# Altium PCB Micromouse_PCB.PcbDoc (part 1 of 3)
Units mm, origin at the board's own origin, x right, y up, seen from the top; angles counter-clockwise.
Board outline 89.28 x 101.5 mm, 2 copper layers (Top Layer, Bottom Layer); 118 components, 108 nets, 360 pads, 157 vias.
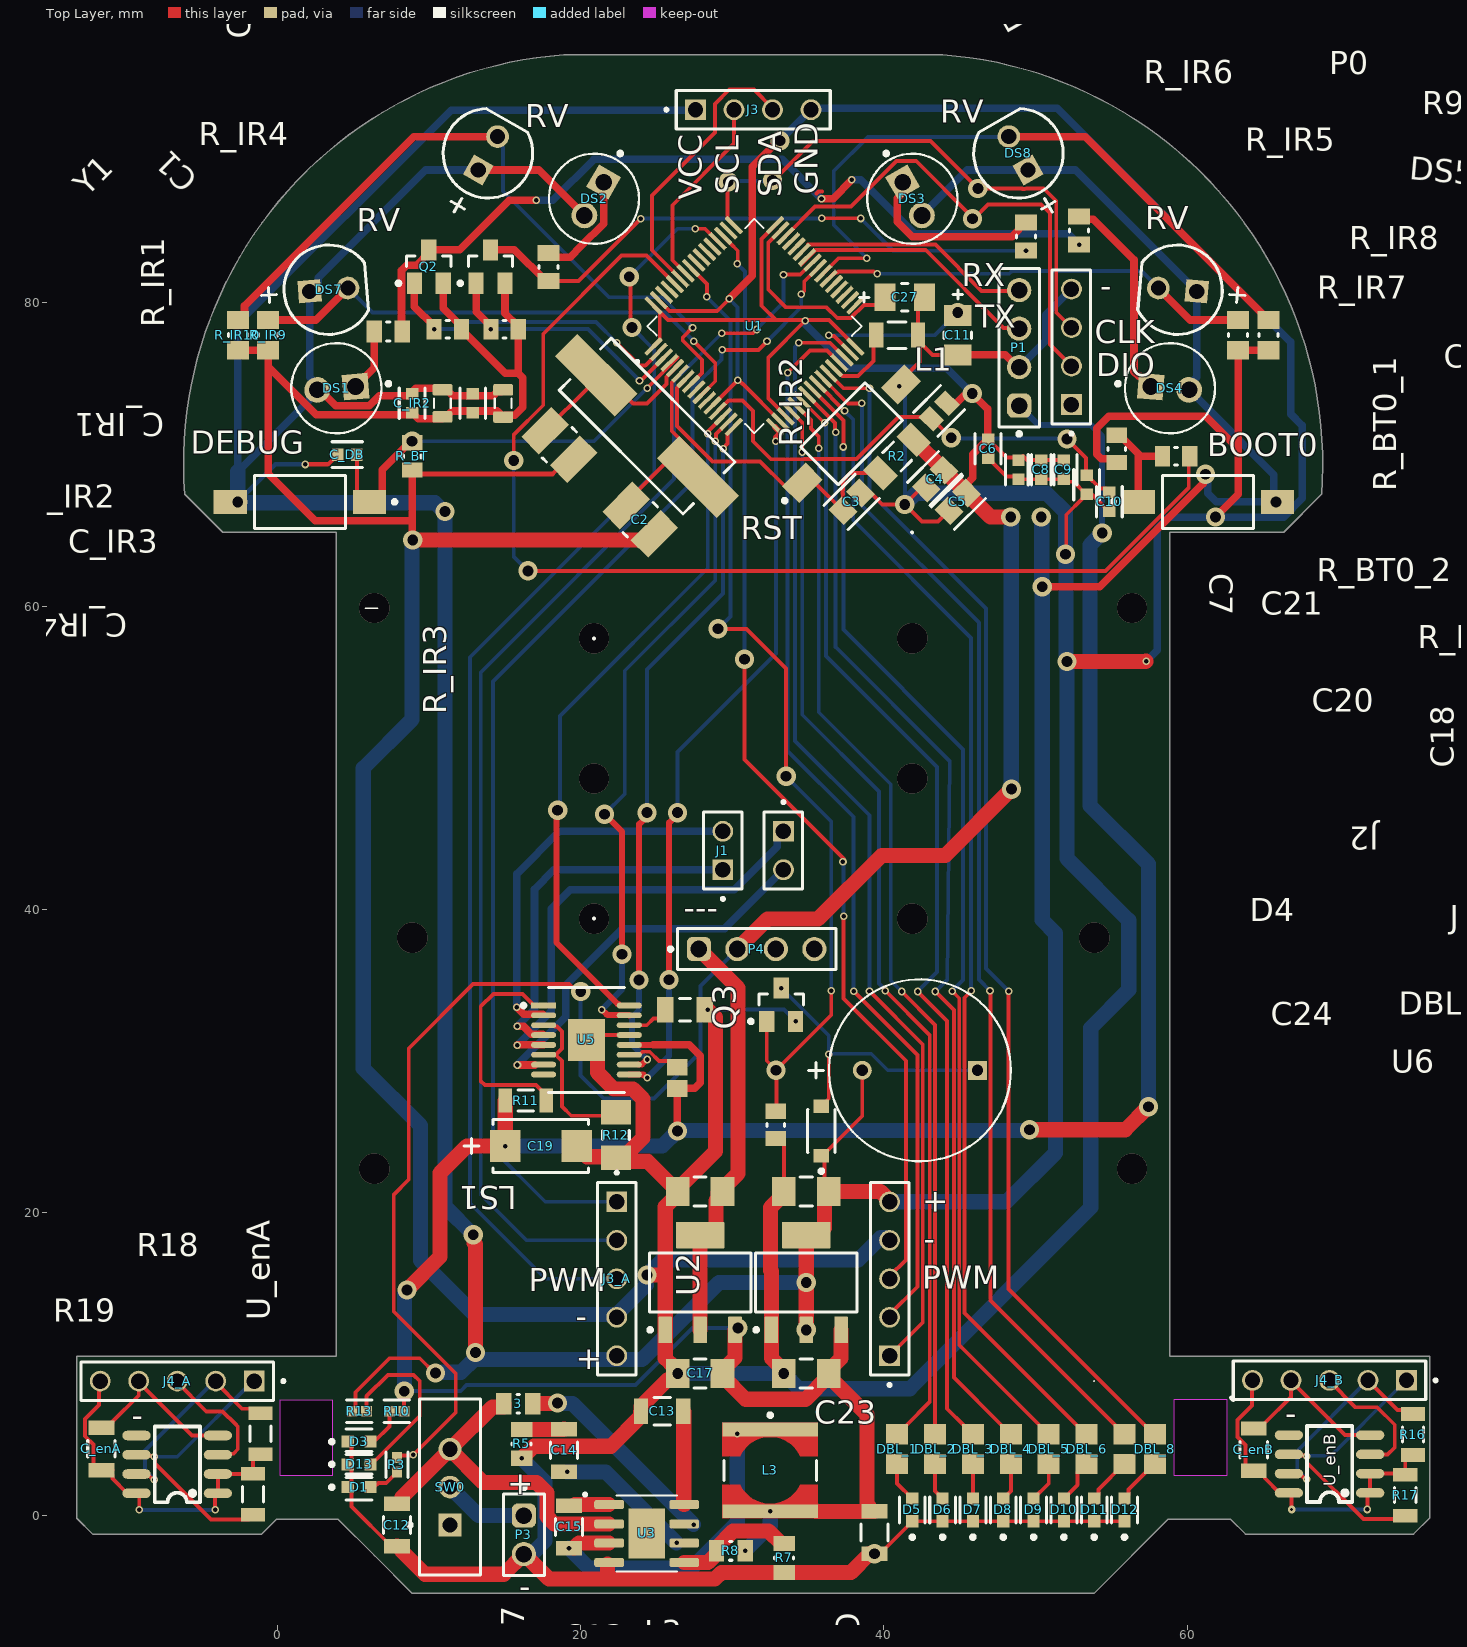
[diagram p0: Top Layer view]
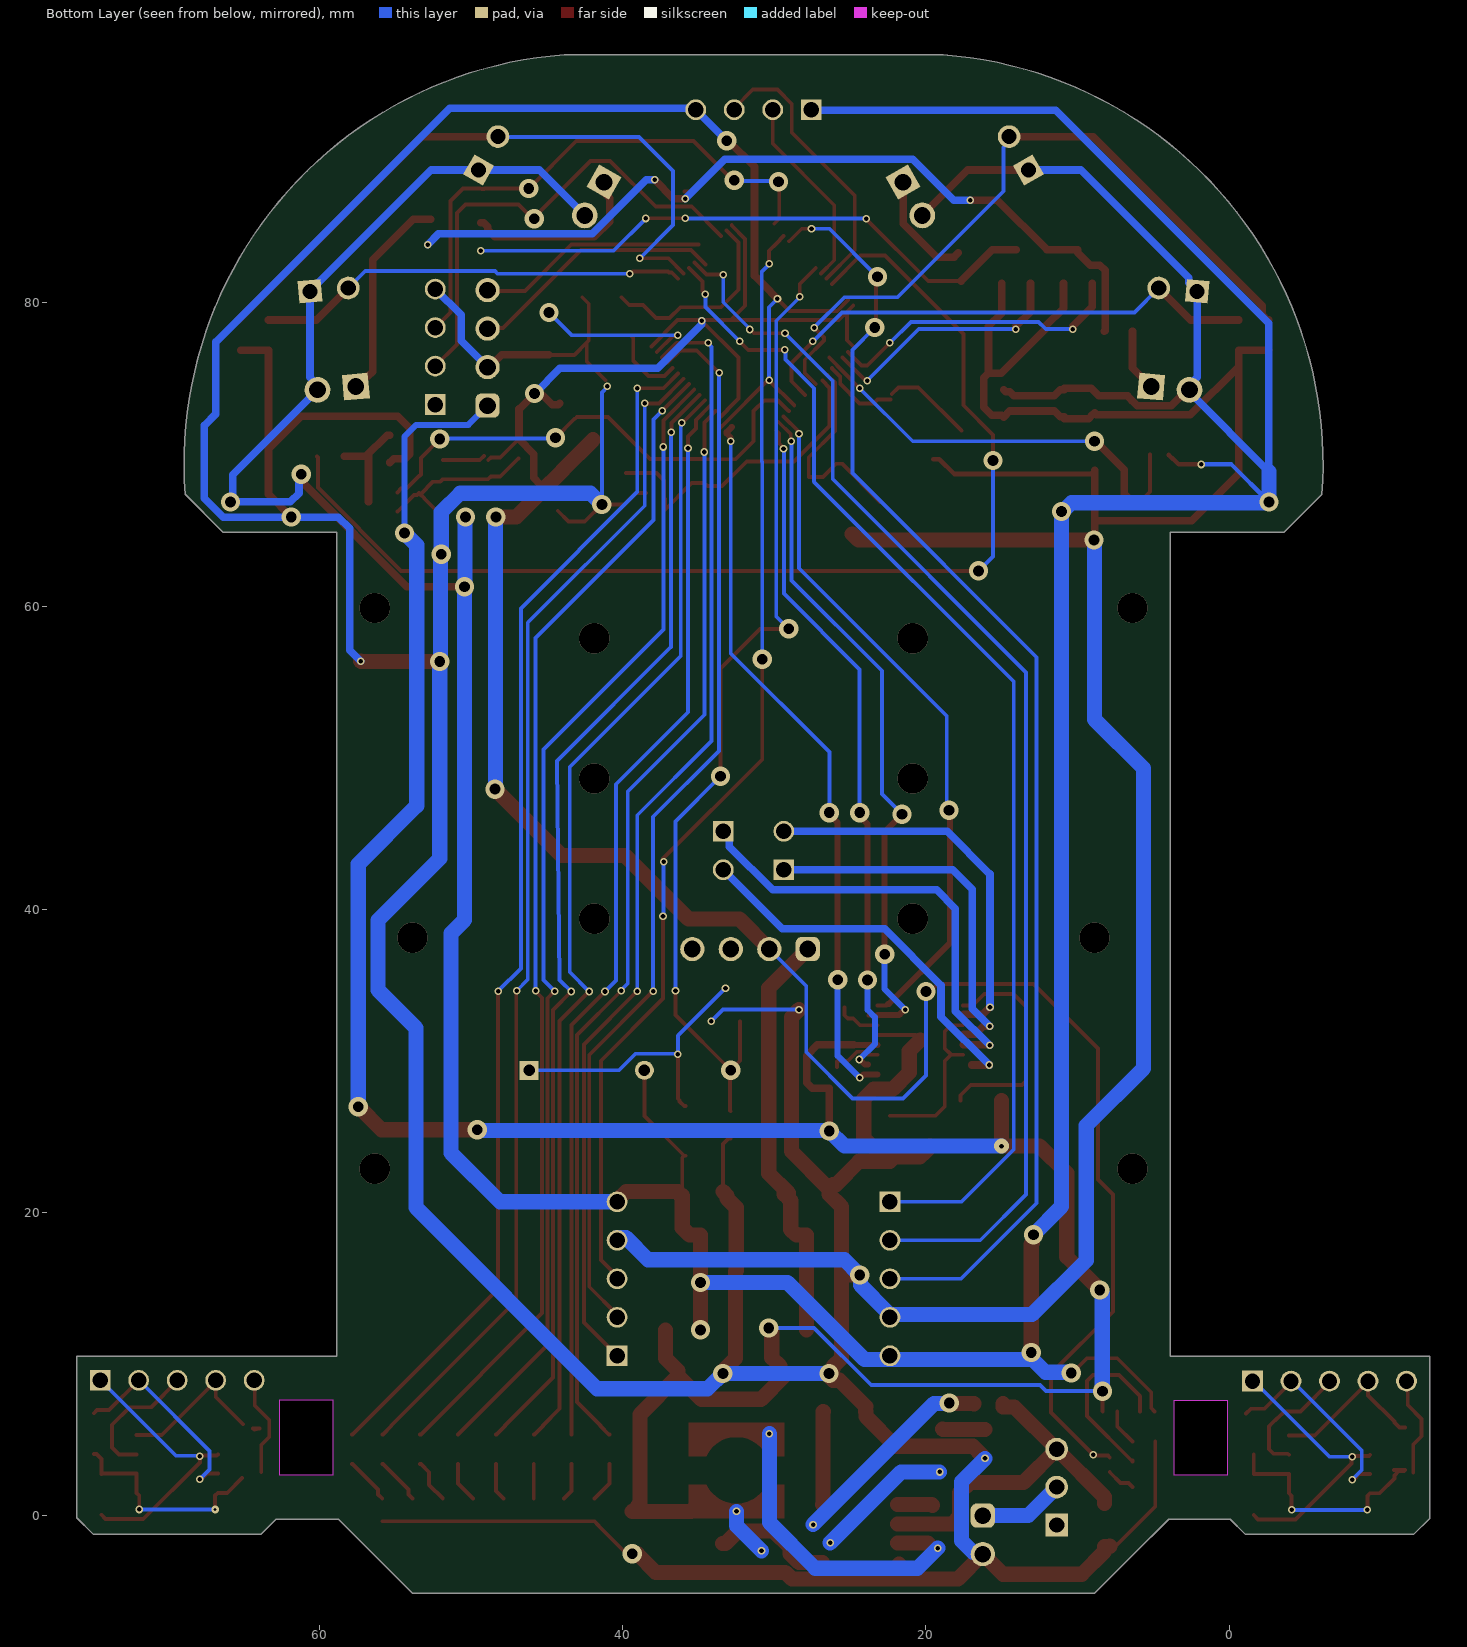
[diagram p1: Bottom Layer view, seen from below]
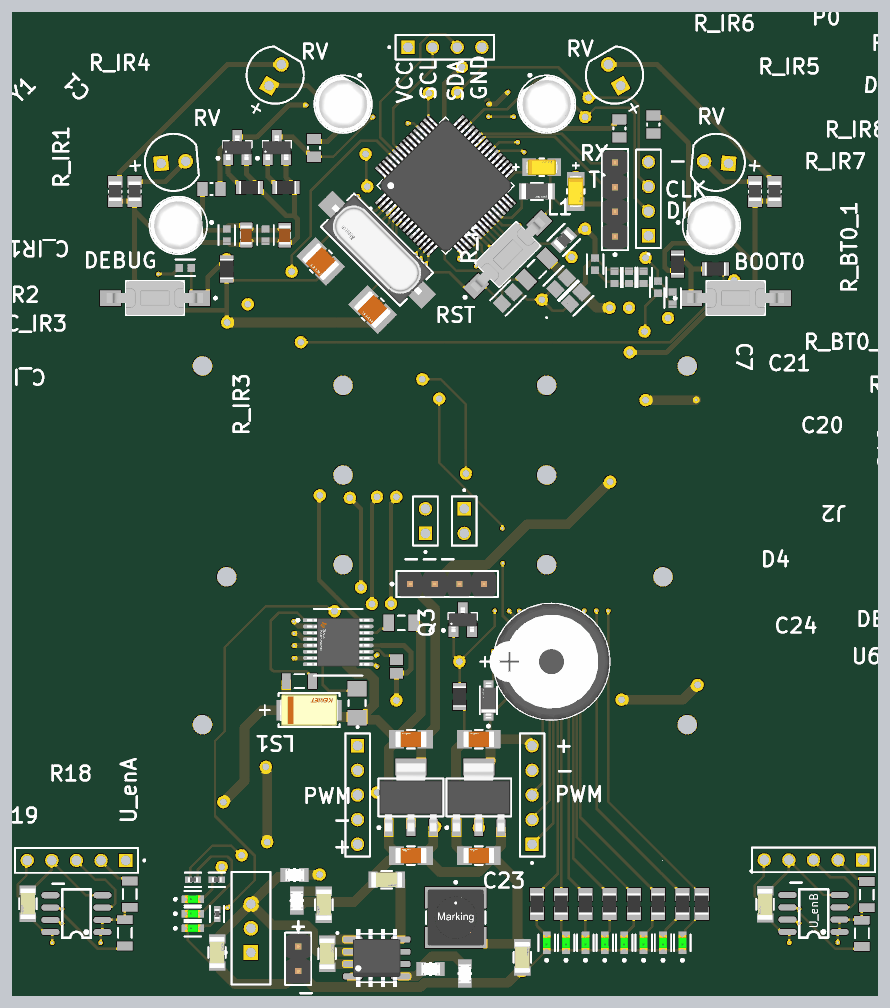
[diagram p3: 3D render of the assembled board from above, using the file's embedded part models]

## Layer stack, top to bottom
Top Solder: solder mask 0.0102, Solder Resist, Dk 3.5
Top Layer: signal copper 0.0356
Dielectric 1: dielectric 0.32, FR-4, Dk 4.8
Bottom Layer: signal copper 0.0356
Bottom Solder: solder mask 0.0102, Solder Resist, Dk 3.5

## Board outline
58.875,10.525 76,10.525 76.025,10.5 76.025,-0.15 74.95,-1.225 63.85,-1.225 62.875,-0.25 58.75,-0.25 53.887,-5.112 8.875,-5.125 6.387,-2.637 3.975,-0.25 -0.075,-0.25 -1.05,-1.225 -1.05,-1.25 -12.175,-1.25 -13.25,-0.175 -13.25,10.5 3.875,10.5 3.875,64.875 -3.625,64.875 -6.125,67.375 cw(c20.875,69.375) 18.875,96.375 43.875,96.375 cw(c41.875,69.375) 68.875,67.375 66.375,64.875 58.875,64.875
cut-out: 0.125,7.6 0.125,2.65 3.625,2.65 3.625,7.6
cut-out: 59.125,7.625 59.125,2.65 62.65,2.65 62.65,7.625

## Design rules (kind name [scope] priority, off if disabled: settings)
Clearance Clearance_U1_FinePitch [InComponent('U1') OR InComponent('R13') OR InComponent('R3') OR InComponent('R10') vs InComponent('U1') OR InComponent('R13') OR InComponent('R3') OR InComponent('R10')] p1: gap=0.1 ignorepadtopadclearanceinfootprint=FALSE
Clearance Clearance_1 [All] p2: gap=0.1 ignorepadtopadclearanceinfootprint=FALSE
Creepage [All] p1: checkdistance=0.5 applytopolygonpour=TRUE
PolygonConnect [All] p1: connectstyle=Relief reliefconductorwidth=0.254 reliefentries=4 polygonreliefangle="90 Angle" airgapwidth=0.254
RoutingVias [All] p1: holewidth=0.711 width=1.27 viastyle="Through Hole" minholewidth=0.3 minwidth=0.4 maxholewidth=3 maxwidth=3
SilkToSilkClearance [All] p1: silktosilkclearance=0.1
SolderMaskExpansion [All] p1: expansion=0.102 istentingtop=FALSE
SupplyNets "Schematic Supply Nets_10" [InNet('GND_inA')] p1: voltage=0.000
SupplyNets "Schematic Supply Nets_9" [InNet('GND_inB')] p2: voltage=0.000
SupplyNets "Schematic Supply Nets_6" [InNet('VDD33_OUT')] p3: voltage=0.000
SupplyNets "Schematic Supply Nets_5" [InNet('VDDA')] p4: voltage=0.000
SupplyNets "Schematic Supply Nets_4" [InNet('V33')] p5: voltage=0.000
SupplyNets "Schematic Supply Nets_3" [InNet('GND')] p6: voltage=0.000
SupplyNets "Schematic Supply Nets_2" [InNet('VIN74')] p7: voltage=0.000
SupplyNets "Schematic Supply Nets_1" [InNet('VOUT5')] p8: voltage=0.000
SupplyNets "Schematic Supply Nets" [InNet('VDD33')] p9: voltage=0.000
UnpouredPolygon UnpouredPolygon_1 [All] p1:
UnpouredPolygon [All] p2:
Width [All] p1: maxlimit=1 minlimit=0.254 preferedwidth=0.5
28 further rules are at their usual default settings.

## Components (designator, comment, footprint, x,y, rotation, side; value= is the part's Value field where it differs from the comment)
3 "100K" FP-CRCW0805-e3-IPC_B 15.875,7.375 r0 top
BOOT0 "" TECO-FSMSMTR_V 61.375,66.875 r0 top
C1 "22pF" FP-CL32-IPC_B 18.588,70.637 r315 top
C2 "22pF" FP-CL32-IPC_B 23.925,65.7 r315 top
C3 "105" FP-CL21-IPC_B 37.875,66.875 r225 top
C4 "2.2uF" FP-CL21-IPC_B 43.375,68.375 r225 top
C5 "2.2uF" FP-CL21-IPC_B 44.875,66.875 r225 top
C6 "100nF" FP-CL10-IPC_C 46.875,70.375 r270 top
C7 "100nF" FP-CL10-IPC_C 48.875,69.002 r270 top
C8 "100nF" FP-CL10-IPC_C 50.375,69.002 r270 top
C9 "100nF" FP-CL10-IPC_C 51.875,69.002 r270 top
C10 "100nF" FP-CL10-IPC_C 54.875,66.875 r270 top
C11 "4.7 uF" FP-TAJA-MFG 44.875,77.875 r90 top
C12 "10uF" FP-C1206C-EB-MFG 7.875,-0.625 r270 top value="10 pF"
C13 "0.1uF" FP-C1206C-EB-MFG 25.375,6.875 r180 top value="10 pF"
C14 "3.9nF" FP-C1206C-EB-MFG 18.9,4.3 r90 top value="10 pF"
C15 "10nF" FP-C1206C-EB-MFG 19.225,-0.75 r270 top value="10 pF"
C16 "22uF" FP-C1206C-EB-MFG 39.375,-1.125 r270 top value="10 pF"
C17 "106" FP-GRT31C-0_2-IPC_A 27.875,9.375 r180 top
C18 "106" FP-GRT31C-0_2-IPC_A 27.875,21.375 r180 top
C19 "106" FP-T491C-MFG 17.375,24.375 r180 top value=10uF
C20 "103" CAPC2013X88X50LL20T25 26.375,28.875 r90 top
C21 "225" CAPC3216X180X50LL20T25 26.875,33.375 r0 top
C22 "10nF" FP-CL10-IPC_C 53.375,68.002 r270 top
C23 "106" FP-GRT31C-0_2-IPC_A 34.875,9.375 r180 top
C24 "106" FP-GRT31C-0_2-IPC_A 34.875,21.375 r180 top
C27 "4.7 uF" FP-TAJA-MFG 41.375,80.375 r180 top
C_DB "100nF" FP-CL10-IPC_C 4.6,69.995 r0 top
C_enA "0.1uF" FP-C1206C-EB-MFG -11.625,4.4 r90 top locked value="10 pF"
C_enB "0.1uF" FP-C1206C-EB-MFG 64.4,4.345 r90 top locked value="10 pF"
C_IR1 "Capacitor 4.7µF +/-40% 25V 0805" CAPC0805(2012)145_L 10.875,73.375 r270 top value=4.7µF
C_IR2 "100nF" FP-CL10-IPC_C 8.875,73.375 r90 top
C_IR3 "Capacitor 4.7µF +/-40% 25V 0805" CAPC0805(2012)145_L 14.875,73.375 r90 top value=4.7µF
C_IR4 "100nF" FP-CL10-IPC_C 12.875,73.375 r270 top
D1 "RED" FP-LTST-C190GKT-MFG 5.375,1.875 r0 top
D3 "RED" FP-LTST-C190GKT-MFG 5.375,4.875 r0 top
D4 "MMSZ5232B" FP-MA02A-MFG 35.875,25.375 r90 top
D5 "RED" FP-LTST-C190GKT-MFG 41.875,0.375 r90 top
D6 "RED" FP-LTST-C190GKT-MFG 43.875,0.375 r90 top
D7 "RED" FP-LTST-C190GKT-MFG 45.875,0.375 r90 top
D8 "RED" FP-LTST-C190GKT-MFG 47.875,0.375 r90 top
D9 "RED" FP-LTST-C190GKT-MFG 49.875,0.375 r90 top
D10 "RED" FP-LTST-C190GKT-MFG 51.875,0.375 r90 top
D11 "RED" FP-LTST-C190GKT-MFG 53.875,0.375 r90 top
D12 "RED" FP-LTST-C190GKT-MFG 55.875,0.375 r90 top
D13 "RED" FP-LTST-C190GKT-MFG 5.375,3.375 r0 top
DBL_1 "Resistor 1k +/-1% 0805 125 mW" RESC2013X70X40ML20T20 40.875,4.375 r90 top value=1k
DBL_2 "Resistor 1k +/-1% 0805 125 mW" RESC2013X70X40ML20T20 43.375,4.375 r90 top value=1k
DBL_3 "Resistor 1k +/-1% 0805 125 mW" RESC2013X70X40ML20T20 45.875,4.375 r90 top value=1k
DBL_4 "Resistor 1k +/-1% 0805 125 mW" RESC2013X70X40ML20T20 48.375,4.375 r90 top value=1k
DBL_5 "Resistor 1k +/-1% 0805 125 mW" RESC2013X70X40ML20T20 50.875,4.375 r90 top value=1k
DBL_6 "Resistor 1k +/-1% 0805 125 mW" RESC2013X70X40ML20T20 53.375,4.375 r90 top value=1k
DBL_7 "Resistor 1k +/-1% 0805 125 mW" RESC2013X70X40ML20T20 55.875,4.375 r90 top value=1k
DBL_8 "Resistor 1k +/-1% 0805 125 mW" RESC2013X70X40ML20T20 57.875,4.375 r90 top value=1k
DEBUG "" TECO-FSMSMTR_V 1.47,66.875 r180 top
DS1 "IR RECV" FP-6_544-5258_09-4-MFG 3.875,74.375 r185 top
DS2 "IR RECV" FP-6_544-5258_09-4-MFG 20.875,86.875 r240 top
DS3 "IR RECV" FP-6_544-5258_09-4-MFG 41.875,86.875 r300 top
DS4 "IR RECV" FP-6_544-5258_09-4-MFG 58.875,74.375 r355 top
DS5 "UR502DC" CGX-UR502DC 59.375,80.875 r175 top
DS6 "UR502DC" CGX-UR502DC 13.875,89.875 r60 top
DS7 "UR502DC" CGX-UR502DC 3.375,80.875 r5 top
DS8 "UR502DC" CGX-UR502DC 48.875,89.875 r120 top
J1 "TSW-102-07-G-S" SAMTEC_TSW-102-07-G-S 29.375,43.875 r90 top
J2 "TSW-102-07-G-S" SAMTEC_TSW-102-07-G-S 33.375,43.875 r270 top locked
J3 "TSW-104-06-L-S" SAMTEC_TSW-104-06-L-S 27.57,92.75 r0 top
J3_A "TSW-105-07-F-S" SAMTEC_TSW-105-07-F-S 22.375,15.62 r270 top locked
J3_B "TSW-105-07-F-S" SAMTEC_TSW-105-07-F-S 40.375,15.62 r90 top locked
J4_A "TSW-105-07-F-S" SAMTEC_TSW-105-07-F-S -6.625,8.871 r180 top locked
J4_B "TSW-105-07-F-S" SAMTEC_TSW-105-07-F-S 69.4,8.92 r180 top locked
L1 "10uH" FP-CB2012-IPC_C 43.649,72.875 r225 top
L3 "10uH" WE-TPC_5818 32.5,2.975 r0 top
LS1 "MCKPX-G1203A-K4056" FP-MCKPX-G1203A-K4056-MFG 42.375,29.375 r180 top
P0 "TSW-104-06-L-S" SAMTEC_TSW-104-06-L-S 52.375,73.295 r90 top
P1 "2.54" 61300411121 48.925,77.04 r90 top
P3 "2.54" 61300211121 16.25,-1.275 r270 top locked
P4 "2.54" 61300411121 31.605,37.375 r0 top
Q1 "FDN335N" FAIR-SSOT3L-3_V 14.05,82.4 r90 top
Q2 "FDN335N" FAIR-SSOT3L-3_V 9.975,82.4 r90 top
Q3 "FDN335N" FAIR-SSOT3L-3_V 33.225,33.7 r90 top
R2 "10K" RESC1206(3216)_M 40.875,69.875 r225 top value="10000.00 Ohm"
R3 "1K" FP-RC1005-IPC_A 7.875,3.354 r270 top
R5 "6.8K" FP-CRCW0805-e3-IPC_B 16.101,4.726 r90 top
R7 "10K" FP-CRCW0805-e3-IPC_B 33.425,-2.801 r90 top
R8 "51K" FP-CRCW0805-e3-IPC_B 29.899,-2.325 r180 top
R9 "100k" FP-RC3216-IPC_C 40.875,77.875 r0 top
R10 "1K" FP-RC1005-IPC_A 7.854,6.875 r180 top
R11 "47k" RESC3216X60X45LL10T20 16.375,27.375 r0 top
R12 "0.2" RESC3216X89X51ML25T25 22.325,25.1 r270 top
R13 "1K" FP-RC1005-IPC_A 5.396,6.875 r0 top
R16 "4.7K" RESC3216X60X45LL10T20 74.9,5.345 r270 top locked
R17 "4.7K" RESC3216X60X45LL10T20 74.4,1.345 r90 top locked
R18 "4.7K" RESC3216X60X45LL10T20 -1.125,5.4 r270 top locked
R19 "4.7K" RESC3216X60X45LL10T20 -1.625,1.4 r90 top locked
R_BT "47k" RESC2013X60X35NL10T20 8.875,69.875 r90 top
R_BT0_1 "47k" RESC2013X60X35NL10T20 59.275,69.875 r180 top
R_BT0_2 "47k" RESC2013X60X35NL10T20 55.375,70.375 r90 top
R_BUZZ "47k" RESC2013X60X35NL10T20 32.875,25.775 r90 top
R_IR1 "47k" RESC2013X60X35NL10T20 14.975,78.275 r180 top
R_IR2 "47k" RESC2013X60X35NL10T20 11.225,78.275 r180 top
R_IR3 "10" RESC2013X50X30NL20T20 7.3,78.125 r180 top
R_IR4 "10" RESC2013X50X30NL20T20 17.875,82.375 r90 top
R_IR5 "10" RESC2013X50X30NL20T20 52.875,84.775 r90 top
R_IR6 "10" RESC2013X50X30NL20T20 49.375,84.375 r90 top
R_IR7 "4.7k" YAGO-RC0805_M 63.375,77.875 r90 top
R_IR8 "4.7k" YAGO-RC0805_M 65.375,77.875 r90 top
R_IR9 "4.7k" YAGO-RC0805_M -0.625,77.875 r90 top
R_IR10 "4.7k" YAGO-RC0805_M -2.625,77.875 r90 top
RST "" TECO-FSMSMTR_V 37.875,71.375 r45 top
SW0 "4mm" ESWI-EG1218_V 11.375,1.875 r90 top
U1 "STM32F405RGT6" QFP50P1200X1200X160-64N 31.457,78.475 r45 top
U2 "LM1117IMP-3.3/NOPB" DCY0004A_N 27.875,15.375 r90 top
U3 "MP2307DN-LF-Z" SOIC127P600X170-9N 24.35,-1.185 r0 top
U5 "DRV8833PWPR" FP-PWP0016C-IPC_B 20.375,31.375 r0 top
U6 "LM1117IMP-3.3/NOPB" DCY0004A_N 34.875,15.375 r90 top
U_enA "MT6701CT-STD" SOP-8_L4.9-W3.9-P1.27-LS6.0-BL -6.625,3.375 r90 top
U_enB "MT6701CT-STD" SOP-8_L4.9-W3.9-P1.27-LS6.0-BL 69.4,3.4 r90 top
Y1 "8.000MHZ" FP-ABLS-MFG 24.375,71.875 r135 top

## Footprints (in the part's own frame and the unit in brackets; to place one, negate y for a bottom-side part, rotate by r counter-clockwise, add the part's x,y. Pads: shape width x height; smd on the part's side, far side on the other; paste and mask are expansions set on the pad)
61300211121 [mm] "Pin Header, pitch 2.54 mm, THT, Vertical, single row, 2p"
  rrect50% 1.6x1.6 hole 1.1: 1(-1.27,0)
  round 1.6 hole 1.1: 2(1.27,0)
  silkscreen extent -3.26,-1.35 2.69,1.35, body extent -2.54,-1.27 2.54,1.27, height 8.57
61300411121 [mm] "Pin Header, pitch 2.54 mm, THT, Vertical, single row, 4p"
  rrect50% 1.6x1.6 hole 1.1: 1(-3.81,0)
  round 1.6 hole 1.1: 2(-1.27,0) 3(1.27,0) 4(3.81,0)
  silkscreen extent -5.8,-1.35 5.23,1.35, body extent -5.08,-1.27 5.08,1.27, height 8.57
CAPC0805(2012)145_L [mm] "Chip Capacitor, Body 2.0x1.2mm, Height 1.45mm, IPC High Density"
  rrect25% 0.76x1.3 smd: 1(-0.9,0) 2(0.89,0)
  silkscreen extent -0.3,-0.55 0.3,0.55, body extent -1,-0.6 1,0.6, height 1.45
CAPC2013X88X50LL20T25 [mm] "Chip Capacitor, 2-Leads, Body 2.00x1.25mm, IPC High Density"
  rect 1.1x1.35 smd: 1(-0.7,0) 2(0.7,0)
  body extent -1.1,-0.72 1.1,0.72, height 0.88
CAPC3216X180X50LL20T25 [mm] "Chip Capacitor, 2-Leads, Body 3.20x1.60mm, IPC High Density"
  rect 1.1x1.7 smd: 1(-1.3,0) 2(1.3,0)
  silkscreen extent -0.35,-0.75 0.35,0.75, body extent -1.7,-0.9 1.7,0.9, height 1.8
CGX-UR502DC [mm] "THD, 2-Leads, Dia 5.9mm, Pin Spacing 2.54mm"
  rect 1.5x1.5 hole 1: 1(-1.27,0)
  round 1.5 hole 1: 2(1.27,0)
  silkscreen extent -4.47,-2.95 2.5,2.95, body extent -2.95,-2.95 2.5,2.95, height 9.1
DCY0004A_N [mm] "SOT223, 4-Leads, Body 6.7x3.7mm, Pitch 2.3mm, IPC Medium Density"
  rrect11% 1.75x0.9 smd: 1(-3.125,2.3) 2(-3.125,0) 3(-3.125,-2.3)
  rrect6% 1.75x3.2 smd: 4(3.125,0)
  silkscreen extent -3.25,-3.35 1.95,3.42, body extent -3.5,-3.25 3.5,3.25, height 1.62
ESWI-EG1218_V [mm] "THD, 3-Leads, Body 11.6x4mm, Pitch 2.5mm"
  rect 1.5x1.5 hole 1: 1(-2.5,0)
  round 1.5 hole 1: 2(0,0) 3(2.5,0)
  silkscreen extent -5.8,-2 5.8,2.77, body extent -5.8,-2 5.8,2, height 7.4
FAIR-SSOT3L-3_V [mm] "SOT23, 3-Leads, Body 2.92x1.4mm, Pitch 0.95mm"
  rect 1.4x1 smd: 1(-1.1,0.95) 2(-1.1,-0.95) 3(1.1,0)
  silkscreen extent -1.22,-1.46 0.7,2.12, body extent -1.26,-1.46 1.26,1.46, height 1.12
FP-6_544-5258_09-4-MFG [mm]
  rect 1.7x1.7 hole 1.1 paste-2539.97 mask+0: 1(-1.27,0)
  round 1.7 hole 1.1 paste-2539.97 mask+0: 2(1.27,0)
  silkscreen extent -3.57,-2.97 2.97,2.97, body extent -3.07,-3.08 3.08,3.08, height 0.25
FP-ABLS-MFG [mm]
  rect 5.6x2.1 smd paste+0 mask+0: 1(-4.75,0) 2(4.75,0)
  silkscreen extent -5.77,-2.42 5.77,2.42, body extent -7.65,-2.53 7.65,2.53, height 0.25
FP-C1206C-EB-MFG [mm]
  rect 0.95x1.7 smd paste+0 mask+0: 1(-1.4,0) 2(1.4,0)
  silkscreen extent -0.55,-0.9 0.55,0.9, body extent -2,-1 2,1, height 0.25
FP-CB2012-IPC_C [mm]
  rect 1.055x1.356 smd paste+0 mask+0: 1(-0.726,0) 2(0.726,0)
  silkscreen extent -1.25,-1.12 1.25,1.12, body extent -1.35,-0.82 1.35,0.82, height 0.25
FP-CL10-IPC_C [mm]
  rect 0.758x0.812 smd paste+0 mask+0: 1(-0.627,0) 2(0.627,0)
  silkscreen extent -1.01,-0.85 1.01,0.85, body extent -1.11,-0.55 1.11,0.55, height 0.25
FP-CL21-IPC_B [mm]
  rect 1.255x1.456 smd paste+0 mask+0: 1(-0.826,0) 2(0.826,0)
  silkscreen extent -1.45,-1.13 1.45,1.13, body extent -1.7,-0.98 1.7,0.98, height 0.25
FP-CL32-IPC_B [mm]
  rect 1.653x2.804 smd paste+0 mask+0: 1(-1.325,0) 2(1.325,0)
  silkscreen extent -0.2,-1.4 0.2,1.4, body extent -2.4,-1.65 2.4,1.65, height 0.25
FP-CRCW0805-e3-IPC_B [mm]
  rect 1.007x1.408 smd paste+0 mask+0: 1(-0.951,0) 2(0.951,0)
  silkscreen extent -0.07,-0.63 0.07,0.63, body extent -1.7,-0.95 1.7,0.95, height 0.25
FP-GRT31C-0_2-IPC_A [mm]
  rect 1.555x1.906 smd paste+0 mask+0: 1(-1.476,0) 2(1.476,0)
  silkscreen extent -0.4,-0.95 0.4,0.95, body extent -2.75,-1.45 2.75,1.45, height 0.25
FP-LTST-C190GKT-MFG [mm]
  rect 0.8x0.8 smd paste+0 mask+0: 1(-0.75,0) 2(0.75,0)
  silkscreen extent -1.92,-0.85 0.85,0.85, body extent -1.25,-0.55 1.25,0.55, height 0.25
FP-MA02A-MFG [mm]
  rect 0.88x1.02 smd paste+0 mask+0: 1(-1.635,0) 2(1.635,0)
  silkscreen extent -2.77,-0.9 1.43,0.9, body extent -2.17,-1 2.17,1, height 0.25
FP-MCKPX-G1203A-K4056-MFG [mm]
  rect 1.25x1.25 hole 0.75 paste-2539.97 mask+0: 1(-3.8,0)
  round 1.25 hole 0.75 paste-2539.97 mask+0: 2(3.8,0)
  silkscreen extent -6,-6 7.35,6, body extent -6.1,-6.1 6.1,6.1, height 0.25
FP-PWP0016C-IPC_B [mm]
  rect 1.655x0.381 smd paste+0 mask+0: 1(-2.825,2.275)
  rrect100% 1.655x0.381 smd paste+0 mask+0: 2(-2.825,1.625) 3(-2.825,0.975) 4(-2.825,0.325) 5(-2.825,-0.325) 6(-2.825,-0.975) 7(-2.825,-1.625) 8(-2.825,-2.275) 9(2.825,-2.275) 10(2.825,-1.625) 11(2.825,-0.975) 12(2.825,-0.325) 13(2.825,0.325) 14(2.825,0.975) 15(2.825,1.625) 16(2.825,2.275)
  rect 2.46x2.77 smd paste-1000 mask+0: 17(0,0)
  silkscreen extent -4.28,-3.45 2.5,3.45, body extent -3.9,-2.75 3.9,2.75, height 0.25
FP-RC1005-IPC_A [mm]
  rect 0.715x0.672 smd paste+0 mask+0: 1(-0.479,0) 2(0.479,0)
  silkscreen extent -0.84,-0.74 0.84,0.74, body extent -1.04,-0.54 1.04,0.54, height 0.25
FP-RC3216-IPC_C [mm]
  rect 0.955x1.658 smd paste+0 mask+0: 1(-1.376,0) 2(1.376,0)
  silkscreen extent -0.6,-0.87 0.6,0.87, body extent -1.95,-0.97 1.95,0.97, height 0.25
FP-T491C-MFG [mm]
  rect 1.99x2.13 smd paste+0 mask+0: 1(-2.36,0) 2(2.36,0)
  silkscreen extent -3.15,-1.75 5.07,1.75, body extent -3.48,-1.87 3.48,1.87, height 0.25
FP-TAJA-MFG [mm]
  rect 1.4x1.8 smd paste+0 mask+0: 1(-1.3,0) 2(1.3,0)
  silkscreen extent -0.23,-0.9 2.98,0.9, body extent -2.1,-1 2.1,1, height 0.25
QFP50P1200X1200X160-64N [mm]
  rrect25% 1.47x0.28 smd: 1(-5.67,3.75) 2(-5.67,3.25) 3(-5.67,2.75) 4(-5.67,2.25) 5(-5.67,1.75) 6(-5.67,1.25) 7(-5.67,0.75) 8(-5.67,0.25) 9(-5.67,-0.25) 10(-5.67,-0.75) 11(-5.67,-1.25) 12(-5.67,-1.75) 13(-5.67,-2.25) 14(-5.67,-2.75) 15(-5.67,-3.25) 16(-5.67,-3.75) 33(5.67,-3.75) 34(5.67,-3.25) 35(5.67,-2.75) 36(5.67,-2.25) 37(5.67,-1.75) 38(5.67,-1.25) 39(5.67,-0.75) 40(5.67,-0.25) 41(5.67,0.25) 42(5.67,0.75) 43(5.67,1.25) 44(5.67,1.75) 45(5.67,2.25) 46(5.67,2.75) 47(5.67,3.25) 48(5.67,3.75)
  rrect25% 0.28x1.47 smd: 17(-3.75,-5.67) 18(-3.25,-5.67) 19(-2.75,-5.67) 20(-2.25,-5.67) 21(-1.75,-5.67) 22(-1.25,-5.67) 23(-0.75,-5.67) 24(-0.25,-5.67) 25(0.25,-5.67) 26(0.75,-5.67) 27(1.25,-5.67) 28(1.75,-5.67) 29(2.25,-5.67) 30(2.75,-5.67) 31(3.25,-5.67) 32(3.75,-5.67) 49(3.75,5.67) 50(3.25,5.67) 51(2.75,5.67) 52(2.25,5.67) 53(1.75,5.67) 54(1.25,5.67) 55(0.75,5.67) 56(0.25,5.67) 57(-0.25,5.67) 58(-0.75,5.67) 59(-1.25,5.67) 60(-1.75,5.67) 61(-2.25,5.67) 62(-2.75,5.67) 63(-3.25,5.67) 64(-3.75,5.67)
  silkscreen extent -7.24,-5 5,5, body extent -6,-6 6,6, height 1.6
RESC1206(3216)_M [mm] "Chip Resistor, Body 3.2x1.6mm, IPC Low Density"
  rect 1.35x1.9 smd: 1(-1.55,0) 2(1.55,0)
  silkscreen extent -0.5,-0.85 0.5,0.85, body extent -1.67,-0.87 1.67,0.87, height 0.75
RESC2013X50X30NL20T20 [mm] "Chip Resistor, 2-Leads, Body 2.00x1.25mm, IPC Medium Density"
  rect 1.05x1.45 smd: 1(-0.925,0) 2(0.925,0)
  silkscreen extent -0.1,-0.63 0.1,0.63, body extent -1.1,-0.72 1.1,0.72, height 0.5
RESC2013X60X35NL10T20 [mm] "Chip Resistor, 2-Leads, Body 2.1x1.35mm, IPC Medium Density"
  rect 1x1.35 smd: 1(-0.9,0) 2(0.9,0)
  silkscreen extent -0.1,-0.58 0.1,0.58, body extent -1.05,-0.68 1.05,0.67, height 0.6
RESC2013X70X40ML20T20 [mm] "Chip Resistor, 2-Leads, Body 2.2x1.35mm, IPC Low Density"
  rect 1.35x1.45 smd: 1(-0.975,0) 2(0.975,0)
  body extent -1.1,-0.67 1.1,0.67, height 0.7
RESC3216X60X45LL10T20 [mm] "Chip Resistor, 2-Leads, Body 3.20x1.60mm, IPC High Density"
  rect 0.9x1.6 smd: 1(-1.35,0) 2(1.35,0)
  silkscreen extent -0.5,-0.7 0.5,0.7, body extent -1.65,-0.85 1.65,0.85, height 0.6
RESC3216X89X51ML25T25 [mm] "Chip Resistor, 2-Leads, Body 3.20x1.60mm, IPC Low Density"
  rect 1.6x1.95 smd: 1(-1.5,0) 2(1.5,0)
  silkscreen extent -0.3,-0.87 0.3,0.87, body extent -1.73,-0.92 1.73,0.92, height 0.89
SAMTEC_TSW-102-07-G-S [mm]
  rect 1.37x1.37 / inner round 1.37 / far side rect 1.37x1.37 hole 1.02: 01(-1.27,0)
  round 1.37 hole 1.02: 02(1.27,0)
  silkscreen extent -3.29,-1.27 2.54,1.27
SAMTEC_TSW-104-06-L-S [mm]
  rect 1.37x1.37 hole 1.02: 01(0,0)
  round 1.37 hole 1.02: 02(2.54,0) 03(5.08,0) 04(7.62,0)
  silkscreen extent -2.02,-1.27 8.89,1.27
SAMTEC_TSW-105-07-F-S [mm]
  rect 1.37x1.37 hole 1.02: 01(-5.08,0)
  round 1.37 hole 1.02: 02(-2.54,0) 03(0,0) 04(2.54,0) 05(5.08,0)
  silkscreen extent -7.1,-1.27 6.35,1.27
SOIC127P600X170-9N [mm]
  rrect50% 1.97x0.6 smd: 1(-2.475,1.905) 2(-2.475,0.635) 3(-2.475,-0.635) 4(-2.475,-1.905) 5(2.475,-1.905) 6(2.475,-0.635) 7(2.475,0.635) 8(2.475,1.905)
  rect 2.41x3.3 smd paste-3: 9(0,0)
  silkscreen extent -4.16,-2.5 2,2.67, body extent -2.45,-3 2.45,3, height 1.7
SOP-8_L4.9-W3.9-P1.27-LS6.0-BL [mm]
  oval 0.63x1.865 smd: 1(-1.905,-2.682) 2(-0.635,-2.682) 3(0.635,-2.682) 4(1.905,-2.682) 5(1.905,2.682) 6(0.635,2.682) 7(-0.635,2.682) 8(-1.905,2.682)
  silkscreen extent -2.5,-1.5 2.5,1.48
TECO-FSMSMTR_V [mm] "SMD, 2-Leads, Body 6x3.5mm, Pitch 9.19mm"
  rect 2.2x1.6 smd: 1(-4.595,0)
  rect 2.18x1.6 smd: 2(4.595,0)
  silkscreen extent -6.37,-1.75 3,1.75, body extent -4.98,-1.75 4.98,1.75, height 4.4
WE-TPC_5818 [mm] "Power Inductor, SMD, 2-Leads, body 5.8x5.8mm"
  rect 6.3x0.9 smd paste-403.566 mask-403.566: 1(0,2.7) 2(0,-2.7)
  Top Layer region: 3.15,-0.95 1.984,-0.95 1.984,-0.95 1.374,-1.718 0.491,-2.145 -0.49,-2.145 -1.374,-1.718 -1.984,-0.95 -1.984,-0.95 -3.15,-0.95 -3.15,-0.95 -3.15,-3.15 3.15,-3.15
  Top Layer region: -3.15,0.95 -1.984,0.95 -1.984,0.95 -1.374,1.718 -0.491,2.145 0.49,2.145 1.374,1.718 1.984,0.95 1.984,0.95 3.15,0.95 3.15,0.95 3.15,3.15 -3.15,3.15
  silkscreen extent -3.05,-0.65 3.05,3.77, body extent -2.9,-2.9 2.9,2.9, height 1.8
YAGO-RC0805_M [mm] "Chip Resistor, 2-Leads, Body 2.00x1.25mm, IPC Low Density"
  rect 1.2x1.45 smd: 1(-1,0) 2(1,0)
  silkscreen extent -0.1,-0.63 0.1,0.63, body extent -1,-0.62 1,0.63, height 0.6

## Part data
3 R5 R7 R8: library part CMP-02407-004732-1, "RES Thick Film, 2.49Ω, 1%, 0.125W, 200ppm/°C, 0805", Case Code (Imperial)=0805, Case Code (Metric)=2012, Max Operating Temperature=155°C, Max Power Dissipation=125mW, Min Operating Temperature=-55°C, Package Quantity=5000, Resistance=2.49R, Temperature Coefficient=200ppm/°C, Tolerance=1%, Voltage Rating=150V, Case/Package=0805, Composition="Thick Film", Contact Plating=Tin, Features="Automotive AEC-Q200", Height=0.02inch, Lead Free="Lead Free", Length=0.079inch, Number of Terminations=2, Packaging="Tape and Reel", Power Rating=125mW, Radiation Hardening=No, Termination=SMD/SMT, Voltage Rating (DC)=150V, Weight=0.000194oz, Width=1.25mm
BOOT0 DEBUG RST: library part CMP-2000-07501-1, "FSMSM Push Button Switch, 50 mA, -35 to 85 degC, 2-Pin SMD, RoHS, Tape and Reel", Case\/Package=SMD/SMT, Contact Current Rating=50mA, Contact Resistance=100mOhm, Manufacturer="TE Connectivity", Max Operating Temperature=85degC, Max Voltage Rating (DC)=12V, Min Operating Temperature=-35degC, Operating Force=180gf, Package Description="2-Pin Surface Mount Device, Body 6 x 3.5 mm, Pitch 9.19 mm", Package Quantity=1800, Package Reference=FSMSMTR, Voltage Rating (DC)=24V, Actuator Length=1.07mm, Actuator Material=Polyamide, Contact Material=Brass, Contact Plating=Silver, Current Rating=50mA, Datasheet URL=http://www.te.com/commerce/DocumentDelivery/DDEController?Action=showdoc&DocId=Customer+Drawing%7F1437566-3%7FC2%7Fpdf%7FEnglish%7FENG_CD_1437566-3_C2_1437566_3_1_c.dwg.pdf%7F1437566-4, Datasheet Version="Rev. C2, 08/2014", Electrical Life=20000Cycles, ELV=Compliant, Illumination Type=Illuminated, Lead Free=LeadFree, Manufacturer URL=http://www.te.com/, Mechanical Life=20000Cycles, Mount=SurfaceMount, Mounting Technology=SurfaceMount, Orientation=Straight, Packaging=TapeandReel, REACH SVHC=Unknown, RoHSCompliant=true, Switch Travel=0.25mm, Termination=GullWing, Throw Configuration=SPST
C1 C2: library part CMP-13271-001877-1, "Cap Ceramic 22uF 6.3V X7R ±20% SMD 1210 +125°C Embossed T/R", Capacitance=22uF, Case Code (Imperial)=1210, Case Code (Metric)=3225, Dielectric=X7R, Max Operating Temperature=125°C, Min Operating Temperature=-55°C, Package Quantity=1, Tolerance=20%, Voltage Rating=6.3V, Case/Package=1210, Depth=2.5mm, Height=2.5mm, Lead Free="Lead Free", Length=3.2mm, Mount="Surface Mount", Packaging="Tape and Reel", Radiation Hardening=No, Thickness=0.106inch, Voltage Rating (DC)=6.3V, Width=0.098inch
C3: library part CMP-13271-002018-1, "CL21 Series 0805 1uF 25V -20/+80% Tolerance Y5V Multilayer Ceramic Chip Capacitor", Capacitance=1uF, Case/Package=0805, Dielectric=Y5V, Max Operating Temperature=85°C, Min Operating Temperature=-30°C, Package Quantity=10000, Tolerance=80%, Voltage Rating=25V, Depth=1.25mm, Height=1.25mm, Length=2mm, Mount="Surface Mount", Packaging="Tape and Reel", Radiation Hardening=No, Thickness=0.053inch, Voltage Rating (DC)=25V, Width=0.049inch
C4 C5: library part CMP-13271-004097-1, "CL21 Series 0805 2.2uF 16V -20/+80% Tolerance Y5V Multilayer Ceramic Chip Capacitor", Case/Package=0805, Dielectric=Y5V, Max Operating Temperature=85°C, Min Operating Temperature=-30°C, Package Quantity=10000, Tolerance=80%, Voltage=10V, Voltage Rating=16V, Capacitance=2.2uF, Depth=1.25mm, Height=1.25mm, Lead Free="Lead Free", Length=2mm, Mount="Surface Mount", Packaging="Tape and Reel", Radiation Hardening=No, Thickness=0.053inch, Voltage Rating (DC)=16V, Width=0.049inch
C6 C7 C8 C9 C10 C_DB C_IR2 C_IR4: library part CMP-13271-001423-1, "Cap Ceramic 100nF 25V X7R ±10% Pad SMD 0603 +125°C T/R", Case Code (Imperial)=0603, Case Code (Metric)=1608, Dielectric=X7R, Max Operating Temperature=125°C, Min Operating Temperature=-55°C, Tolerance=10%, Voltage Rating=25V, Capacitance=100nF, Case/Package=0603, Depth=0.8mm, Height=0.8mm, Length=1.6mm, Mount="Surface Mount", Packaging="Tape and Reel", Radiation Hardening=No, Thickness=0.035inch, Width=0.031inch
C11 C27: library part CMP-04424-000323-2, "4.7uF 20V  ±10% 4Ω 3216(mm)  SMD Tantalum Capacitor", Capacitance=4.7µF, Case Code (Imperial)=1206, Case Code (Metric)=3216, Dielectric Material=Tantalum, ESR (Equivalent Series Resistance)=4Ω, Leakage Current=900nA, Max Operating Temperature=125°C, Min Operating Temperature=-55°C, Ripple Current=137mA, Tolerance=10%, Voltage=20V, Case/Package=1206, Depth=1.6mm, Dissipation Factor=6%, Features="General Purpose", Height=1.6mm, Height - Seated (Max)=1.8034mm, Lead Free="Lead Free", Lead Pitch=1.1mm, Length=3.2mm, Life (Hours)=2000hours, Lifecycle Status=Production, Mount="PCB, Surface Mount", NexarPartId=39985789, Number of Pins=2, Packaging="Cut Tape (CT)", Polarity=Polar, Q Factor=6, Radiation Hardening=No, REACH SVHC="No SVHC", RoHS=Compliant, Schedule B=8532210050, Termination=SMD/SMT, Voltage Rating=20V, Voltage Rating (DC)=20V, Width=1.6mm
C12: library part CMP-1037-00646-2, "C1206 10 uF C0G 5.00% 50 V", Capacitance="10 pF", Manufacturer=KEMET, Manufacturer Part Number=C1206C100J5GAC, Package=C1206C-EB, Temperature="-55°C to +150°C", Temperature Characteristic=C0G, Temperature Coefficient=15%, Temperature Range High=+150°C, Temperature Range Low=-55°C, Tolerance=0.05, Voltage Rating="50 V", Automotive=Yes, Automotive Grade="Grade 0", Category=Cap, ComponentLink2Description=Datasheet, ComponentLink2URL=https://content.kemet.com/datasheets/KEM_C1007_X8R_ULTRA_150C_SMD.pdf, Device Class L1="Passive Components", Device Class L2=Capacitors, Device Class L3="Ceramic Capacitors", Height=0.88mm, Ipc Land Pattern Name=CAPC320160X78, Lead Free=Yes, Material=Ceramic, Mouser Description="Multilayer Ceramic Capacitors MLCC - SMD/SMT 50volts 10pF 5% C0G", Octopart=https://octopart.com/c1206c100j5gac-kemet-1357555, RoHS=TRUE
C13 C15 C16 C_enA C_enB: library part CMP-1037-00646-2, "C1206 10 pF C0G 5.00% 50 V", Capacitance="10 pF", Manufacturer=KEMET, Manufacturer Part Number=C1206C100J5GAC, Package=C1206C-EB, Temperature="-55°C to +150°C", Temperature Characteristic=C0G, Temperature Coefficient=15%, Temperature Range High=+150°C, Temperature Range Low=-55°C, Tolerance=0.05, Voltage Rating="50 V", Automotive=Yes, Automotive Grade="Grade 0", Category=Cap, ComponentLink2Description=Datasheet, ComponentLink2URL=https://content.kemet.com/datasheets/KEM_C1007_X8R_ULTRA_150C_SMD.pdf, Device Class L1="Passive Components", Device Class L2=Capacitors, Device Class L3="Ceramic Capacitors", Height=0.88mm, Ipc Land Pattern Name=CAPC320160X78, Lead Free=Yes, Material=Ceramic, Mouser Description="Multilayer Ceramic Capacitors MLCC - SMD/SMT 50volts 10pF 5% C0G", Octopart=https://octopart.com/c1206c100j5gac-kemet-1357555, RoHS=TRUE
C14: library part CMP-1037-00646-2, "C1206 4.8nF C0G 5.00% 50 V", Capacitance="10 pF", Manufacturer=KEMET, Manufacturer Part Number=C1206C100J5GAC, Package=C1206C-EB, Temperature="-55°C to +150°C", Temperature Characteristic=C0G, Temperature Coefficient=15%, Temperature Range High=+150°C, Temperature Range Low=-55°C, Tolerance=0.05, Voltage Rating="50 V", Automotive=Yes, Automotive Grade="Grade 0", Category=Cap, ComponentLink2Description=Datasheet, ComponentLink2URL=https://content.kemet.com/datasheets/KEM_C1007_X8R_ULTRA_150C_SMD.pdf, Device Class L1="Passive Components", Device Class L2=Capacitors, Device Class L3="Ceramic Capacitors", Height=0.88mm, Ipc Land Pattern Name=CAPC320160X78, Lead Free=Yes, Material=Ceramic, Mouser Description="Multilayer Ceramic Capacitors MLCC - SMD/SMT 50volts 10pF 5% C0G", Octopart=https://octopart.com/c1206c100j5gac-kemet-1357555, RoHS=TRUE
C17 C18 C23 C24: library part CMP-06035-000076-2, "Multi-Layer Ceramic Capacitor 10uF 50V X5R ±10% 1206 Emboss T/R", Capacitance=10uF, Case Code (Imperial)=1206, Case Code (Metric)=3216, Dielectric=X5R, Max Operating Temperature=85°C, Min Operating Temperature=-55°C, Ratings=AEC-Q200, Tolerance=10%, Voltage Rating=50V, Case/Package=1206, Length=0.126inch, Mount="Surface Mount", Packaging="Cut Tape", Thickness=0.071inch, Voltage Rating (DC)=50V, Width=0.063inch
C19: library part CMP-03017-000001-1, "CAP TANT 10UF 10% 25V 2312", Capacitance=10uF, Leakage Current=2.5uA, Manufacturer=Kemet, Manufacturer Part Number=T491C106K025AT, Package=T491C, Ripple Current=271mA, Temperature="-55°C to +125°C", Temperature Range High=+125°C, Temperature Range Low=-55°C, Tolerance=10%, Voltage Rating=25V, Automotive=No, Category=Cap, ComponentLink2Description=Datasheet, ComponentLink2URL=https://content.kemet.com/datasheets/KEM_T2005_T491.pdf, Device Class L1="Passive Components", Device Class L2=Capacitors, Device Class L3="Tantalum Capacitors", Digikey Description="CAP TANT 10UF 10% 25V 2312", Dissipation Factor=6%, Esr=1.5Ω, Height=2.8mm, Lead Free=Yes, Life=2000Hours, Material=Tantalum, Mouser Description="Tantalum Capacitors - Solid SMD 25V 10uF 10% C", Octopart=https://octopart.com/t491c106k025at-kemet-126002, RoHS=TRUE, Standoff Height=0mm
C20: library part CMP-2007-00266-1, Manufacturer=Kemet, Part Number=C0805C103K5RACTU
C21: library part CMP-1037-04831-2, "Chip Capacitor, 2.2 uF, +/- 10%, 50 V, -55 to 125 degC, 1206 (3216 Metric), RoHS, Tape and Reel", Capacitance=2.2uF, Capacitance - nF=2200nF, Case Code - in=1206, Case Code - mm=3216, Case Height=1.6mm, Case Length=3.2mm, Dielectric=X7R, Manufacturer=Kemet, Maximum Operating Temperature=+125C, Minimum Operating Temperature=-55C, Operating Temperature Range=-55Cto+125C, Package / Case=1206(3216metric), Package Description="2-Pin Surface Mount Device, Body 3.2 x 1.6 mm", Temperature Coefficient / Code=+/-15%, Tolerance=10%, Voltage Rating=50V, Brand=Kemet, Case Width=1.6mm, Class=Class1, Datasheet URL=http://www.kemet.com/docfinder?Partnumber=C1206C225K5RACTU, Datasheet Version=02/2016, Dimensions=1.6mmWx3.2mmLx1.6mmH, Factory Pack Quantity=2000, Manufacturer URL=http://www.kemet.com/, Mounting Technology=SurfaceMount, Package Reference=1206, Packaging=Reel, Product=GeneralTypeMLCCs, Product Category=MultilayerCeramicCapacitorsMLCC-SMD/SMT, RoHS=Details, Series=C1206C, Termination Style=SMD/SMT, Type=SMDMLCCX7R6.3-250VDCCommericalGrade, Voltage Rating DC=50V
C22: library part CMP-13271-001423-1, "Cap Ceramic 100nF 25V X7R ±10% Pad SMD 0603 +125°C T/R", Capacitance=100nF, Case Code (Imperial)=0603, Case Code (Metric)=1608, Dielectric=X7R, Max Operating Temperature=125°C, Min Operating Temperature=-55°C, Tolerance=10%, Voltage Rating=25V, Case/Package=0603, Depth=0.8mm, Height=0.8mm, Length=1.6mm, Mount="Surface Mount", Packaging="Tape and Reel", Radiation Hardening=No, Thickness=0.035inch, Width=0.031inch
C_IR1 C_IR3: library part CMP-001-00080-4, "Chip Capacitor, 4.7µF +/-40%, 25V, 0805, Thickness 1.45 mm", Case/Package=0805, Max Operating Temperature=85°C, Min Operating Temperature=-55°C, Tolerance=20%, Voltage Rating=25V, Mounting Technology=SMT, Pins=2
D1 D3 D5 D6 D7 D8 D9 D10 D11 D12 D13: library part CMP-22017-000005-2, "LED GREEN CLEAR CHIP SMD", Case Code (Imperial)=0603, Case Code (Metric)=1608, Color=Green, Forward Current=30mA, Forward Voltage=2.1V, Lens Color=Colorless, Max Operating Temperature=85°C, Min Operating Temperature=-55°C, Package Quantity=1, Power Dissipation=100mW, Reverse Voltage=5V, Test Current=10mA, Voltage=2V, Case/Package=0603, Depth=0.8mm, Dominant Wavelength=569nm, Height=0.8mm, Illumination Color=Green, Lead Free="Lead Free", Length=1.6mm, Lens Style=Clear, Lens Transparency=Clear, Luminous Intensity=6mcd, Mount="Surface Mount", Number of Elements=1, Number of LEDs=1, Number of Pins=2, Packaging="Tape and Reel", Power Rating=100mW, Radiation Hardening=No, Viewing Angle=130°, Wavelength=565nm, Width=0.8mm
D4: library part CMP-00278-11829623-1, "MMSZ5232B MMSZ523 Series 500 mW 5.6 V 10 mA SMT Half-Watt Zener Diode SOD-123", Forward Voltage=900mV, Max Junction Temperature (Tj)=150°C, Max Power Dissipation=500mW, Max Reverse Leakage Current=5µA, Min Operating Temperature=-55°C, Reverse Voltage=3V, Test Current=20mA, Tolerance=5%, Voltage Rating (DC)=5.6V, Contact Plating=Tin, Element Configuration=Single, ESD Protection=No, Height=1.28mm, Impedance=11Ω, Lead Free="Lead Free", Length=2.85mm, Max Operating Temperature=150°C, Mount="Surface Mount", NexarPartId=11829623, Number of Pins=2, Packaging="Cut Tape", Peak Reverse Current=5µA, Power Dissipation=500mW, Power Rating=500mW, Radiation Hardening=No, REACH SVHC="No SVHC", RoHS=Compliant, Voltage Tolerance=5%, Weight=30mg, Width=1.8mm, Working Voltage=5.6V, Zener Current=20mA, Zener Voltage=5.6V
DBL_1 DBL_2 DBL_3 DBL_4 DBL_5 DBL_6 DBL_7 DBL_8: library part CMP-009-00010-5, "Chip Resistor, 1 KOhm, +/- 1%, 0.125 W, -55 to 155 degC, 0805 (2013 Metric)", Case/Package=0805, Max Operating Temperature=155°C, Min Operating Temperature=-55°C, Power=125mW, Tolerance=1%, Voltage Rating=150V, Mounting Technology=SM, Pins=2, RoHS Compliant=True
DS1 DS2 DS3 DS4: library part CMP-00030-41223146-1, "TSFF5210 TSFF5210 IR LED, 870nm, T-1 3/4 (5mm) Through Hole package", Case/Package=Radial, Forward Current=100mA, Forward Voltage=1.5V, Max Operating Temperature=85°C, Min Operating Temperature=-40°C, Power Dissipation=180W, Power Rating=250mW, Reverse Voltage=5V, Contact Plating=Tin, Depth=5.8mm, Lead Free="Lead Free", Length=5.8mm, Lens Style="Circular, Colorless, Diffused, Round", Mount="Through Hole", NexarPartId=41223146, Number of Elements=1, Number of LEDs=1, Number of Pins=2, Orientation="Top View", Packaging=Bulk, Peak Wavelength=870nm, Radiation Hardening=No, REACH SVHC=Unknown, Rise Time=15ns, RoHS=Compliant, Schedule B="8541402000, 8541402000", Test Current=100mA, Viewing Angle=20°, Wavelength=870nm
DS5 DS6 DS7 DS8: library part CMP-007-00009-2, "Red LED, 80 mW, 30 mA, -25 to 85 degC, 2-Pin THD", Manufacturer="Shenzhen CGX", Package Description="2-Pin Through Hole Device, Dia 5.9 mm, Height 9.1 mm", Power=80mW, Case/Package=UR502DC, Datasheet URL=http://datasheet.octopart.com/UR502DC-Chengguangxing-datasheet-62330342.pdf, Datasheet Version=Sep-14, Manufacturer URL=http://szcgx.com/, Mounting Technology=TH, Package Reference=UR502DC, RoHS Compliant=Unknown
J1 J2: library part CMP-033-000000-1, Package=None, Availability=Unavailable, Component Type=Standard, Design Item ID=TSW-102-07-G-S, MF=Samtec, MP=TSW-102-07-G-S, Pin Count=2, Price=None, Source=TSW-102-07-G-S.SchLib
J3 P0: library part CMP-009-000000-1, Package=None, Availability=Unavailable, Component Type=Standard, Design Item ID=TSW-104-06-L-S, MP=TSW-104-06-L-S, Pin Count=4, Price=None, Source=TSW-104-06-L-S.SchLib
J3_A J3_B J4_A J4_B: library part CMP-023-000001-1, Package=None, Availability=Unavailable, Component Type=Standard, Design Item ID=TSW-105-07-F-S, MF=Samtec, MP=TSW-105-07-F-S, Pin Count=5, Price=None, Source=TSW-105-07-F-S.SchLib
L1: library part CMP-14484-000302-1, "SMD Inductors 10uH ±20% 0.34A 1.56Ω 0805", Case Code (Imperial)=0805, Case Code (Metric)=2012, Current Rating=340mA, DC Resistance (DCR)=1.56R, Inductance Tolerance=20%, Inductor Type=POWER, Max DC Current=240mA, Max Operating Temperature=105°C, Min Operating Temperature=-40°C, Package Quantity=3000, Resistor Type=Wirewound, Self Resonant Frequency=40MHz, Test Frequency=2.52MHz, Case/Package=0805, Core Material=Ferrite, Depth=1.25mm, Halogen Free="Halogen Free", Height=1.25mm, Height - Seated (Max)=0.057inch, Inductance=10uH, Lead Free=Exempt, Length=2mm, Mount="Surface Mount", Number of Pins=2, Packaging="Tape and Reel", REACH SVHC="No SVHC", RoHS Compliant=Yes, Saturation Current=240mA, Series=CBC, Shielding=Unshielded, Termination=SMD/SMT, Tolerance=20%, Width=0.049inch
L3: library part CMP-0227-00416-3, Ambient Temperature Range High=95°C, Ambient Temperature Range Low=-40°C, Case Code (Imperial)=2323, Case Code (Metric)=5858, Current Rating=1.45A, DC Resistance (DCR)=70mΩ, Inductance=6.2µH, Inductance Tolerance=30%, Max Operating Temperature=125°C, Saturation Current=1.6A, Self Resonant Frequency=45MHz, Test Frequency=100kHz, Case/Package=2323, Composition=Wirewound, Core Material=Ferrite, Depth=5.8mm, Height=1.8mm, Height - Seated (Max)=2.0066mm, Length=5.8mm, Max DC Current=1.45A, Min Operating Temperature=-40°C, Mount="Surface Mount", NexarPartId=22866864, Number of Pins=2, Packaging="Cut Tape (CT)", REACH SVHC=Unknown, RMS Current (Irms)=1.45A, RoHS=Compliant, Shielding=Shielded, Termination=SMD/SMT, Tolerance=30%, Weight=248.001628mg, Width=5.8mm
LS1: library part CMP-12433-000001-1, "MAGNETIC BUZZER AND TRANSDUCER - More Details", Current=30mA, Frequency=2300Hz, Manufacturer="Multicomp Pro", Max Supply Voltage=5V, Min Supply Voltage=2V, Operating Supply Voltage=3V, Package=0, Temperature="-20°C to +70°C", Temperature Range High=+70°C, Temperature Range Low=-20°C, Automotive=No, Category=Speak, ComponentLink2Description=Datasheet, ComponentLink2URL=http://www.farnell.com/datasheets/1498149.pdf?_ga=2.17855225.1157923166.1572356775-536200964.1569240579, Device Class L1=Electromechanical, Device Class L2="Audio Products", Device Class L3=Buzzers, Height=9.5mm, Lead Free=Yes, Manufacturer Part Number=MCKPX-G1203A-K4056, Octopart=https://octopart.com/mckpx-g1203a-k4056-multicomp-12157154, RoHS=TRUE, Standoff Height=0.5mm
P1 P4: library part CMP-1502-01064-3, Color=Black, Contact Resistance=20mΩ, Current Rating=3A, Max Operating Temperature=105°C, Min Operating Temperature=-40°C, Operating Supply Voltage=250V, Connector Type="Male Pin", Contact Material=Copper, Contact Mating Length=5.9944mm, Contact Plating=Gold, Gender=Male, Height=8.89mm, Lead Free="Lead Free", Lead Pitch=2.54mm, Mount="Through Hole", NexarPartId=32855522, Number of Contacts=4, Number of Pins=4, Number of Positions=4, Number of Rows=1, Orientation=Vertical, Packaging=Bulk, Pitch=2.54mm, REACH SVHC=Unknown, RoHS=Compliant, Termination=Solder, Voltage Rating=250V
P3: library part CMP-1712-00002-6, Color=Black, Contact Resistance=20mΩ, Current Rating=3A, Max Operating Temperature=125°C, Min Operating Temperature=-40°C, Operating Supply Voltage=250V, Connector Type="Male Pin", Contact Gender=Male, Contact Material=Copper, Contact Mating Length=5.9944mm, Contact Plating=Gold, Gender=Male, Height=8.94mm, Housing Material=PBT, Lead Free="Lead Free", Lead Pitch=2.54mm, Mount="Through Hole", NexarPartId=20081794, Number of Contacts=2, Number of Pins=2, Number of Positions=2, Number of Rows=1, Orientation=Vertical, Packaging=Bulk, Pitch=2.54mm, REACH SVHC="No SVHC", RoHS=Compliant, Termination="Through Hole", Voltage Rating=250V
Q1 Q2 Q3: library part CMP-2000-06249-1, "N-Channel Specified PowerTrench(R) MOSFET, 2.5 V, 1.7 A, -55 to 150 degC, 3-Pin SSOT3L, RoHS, Tape and Reel", Manufacturer=FairchildSemiconductor, Maximum Continuous Drain Current=1.7A, Maximum Drain Source Voltage=20V, Maximum Gate Source Voltage=±8V, Operating Temperature=-55to150°C, Package=3SuperSOT, Package Description="3-Pin Small Outline Transistor, Body 2.92 x 1.4 mm, Pitch 0.95 mm", Package Reference=SSOT3L, Package Version="Rev. 3, 05/2015", Category=MOSFET, Channel Mode=Enhancement, Channel Type=N, Datasheet URL=https://www.fairchildsemi.com/datasheets/FD/FDN335N.pdf, Datasheet Version="Rev. C, 04/1999", Manufacturer URL=https://www.fairchildsemi.com/, Mounting=SurfaceMount, Mounting Technology=SurfaceMount, Package URL=https://www.fairchildsemi.com/package-drawings/MA/MA03B.pdf, Packaging=Tape&Reel, Rad Hard=No, RDS-on=0.07@4.5VOhm, Typical Fall Time=3ns, Typical Rise Time=8.5ns, Typical Turn-Off Delay Time=11ns, Typical Turn-On Delay Time=5ns
R2: library part CMP-1014-00098-1, "10K 0.25W 5% 1206 (3216 Metric)  SMD", Case-EIA=1206, Case-Metric=3216, Power="0.25 W", Tolerance="5 %", Technology=SMT
R3 R10 R13: library part CMP-13261-004451-1, "Res Thick Film 0402 1kΩ 1% 0.063W ±100ppm/°C Molded SMD T/R", Case Code (Imperial)=0402, Case Code (Metric)=1005, Max Operating Temperature=155°C, Max Power Dissipation=63mW, Min Operating Temperature=-55°C, Resistance=1kR, Temperature Coefficient=100ppm/°C, Tolerance=1%, Voltage Rating (DC)=50V, Case/Package=0402, Composition="Thick Film", Contact Plating=Tin, Depth=0.5mm, Features="Moisture Resistant", Height=0.016inch, Lead Free="Lead Free", Length=1mm, Military Standard=Not, Number of Terminations=2, Packaging="Tape and Reel", Radiation Hardening=No, Width=0.02inch
R9: library part CMP-13261-005388-1, "Res Thick Film 1206 10kΩ 5% 0.25W ±100ppm/°C Molded SMD T/R", Case Code (Imperial)=1206, Case Code (Metric)=3216, Max Operating Temperature=155°C, Max Power Dissipation=250mW, Min Operating Temperature=-55°C, Resistance=10kR, Temperature Coefficient=100ppm/°C, Tolerance=5%, Voltage Rating (DC)=200V, Case/Package=1206, Composition="Thick Film", Contact Plating=Tin, Depth=1.6mm, Features="Moisture Resistant", Height=0.026inch, Lead Free="Lead Free", Length=0.126inch, Military Standard=Not, Number of Terminations=2, Packaging="Tape and Reel", Radiation Hardening=No, Width=0.063inch
R11 R16 R17 R18 R19: library part CMP-2003-02213-1, Manufacturer="Vishay Dale", Part Number=CRCW120647K0FKEA
R12: library part CMP-2003-04372-1, Manufacturer="Vishay Dale", Part Number=WSL1206R2000FEA
R_BT R_BT0_1 R_BT0_2 R_BUZZ R_IR1 R_IR2: library part CMP-1659-00011-4, "Chip Resistor, 47 KOhm, +/- 1%, 0.125 W, -55 to 155 degC, 0805 (2012 Metric), RoHS, Tape and Reel", Manufacturer=Yageo, Max Operating Temperature="155 degC", Min Operating Temperature="-55 degC", Package Quantity=200, Voltage Rating="150 V", ComponentLink1Description="Manufacturer URL", ComponentLink1URL=http://www.yageo.com/, ComponentLink2Description=Datasheet, ComponentLink2URL=http://www.yageo.com/documents/recent/PYu-RC_Group_51_RoHS_L_04.pdf, DatasheetVersion="Rev. 4, 02/2016", Height="0.5 mm", Length="2 mm", Mount="Surface Mount", Mounting Technology="Surface Mount", PackageDescription="2-Pin Surface Mounted Device, Body 2 x 1.25 mm", PackageReference=0805, Packaging="Tape and Reel", Pins=2, REACH SVHC="No SVHC", RoHSCompliant=true
R_IR3 R_IR4 R_IR5 R_IR6: library part CMP-2001-04915-1, Manufacturer="Vishay Dale", Part Number=CRCW080510R0FKEA
R_IR7 R_IR8 R_IR9 R_IR10: library part CMP-1568-00001-1, "General Puprose Chip Resistor, 4700 Ohm +/- 1%, 0.125 W, -55 to 155 degC, 2-Pin SMD, RoHS, Tape and Reel", PartNumber=RC0805FR-074K7L, Power="0.125 W", Resistance="4700 Ohm", Temperature Max="155 degC", Temperature Min="-55 degC", Tolerance="+/- 1%", ComponentLink1Description="Manufacturer URL", ComponentLink1URL=http://www.yageo.com/NewPortal/_en/index.jsp, ComponentLink2Description=Datasheet, ComponentLink2URL=http://www.yageo.com/documents/recent/PYu-RC_Group_51_RoHS_L-3.pdf, DatasheetVersion="Rev. 3", Mounting Technology="Surface Mount", PackageDescription="2-Pin Surface Mount Device, Body 2 x 1.25 mm", Packing="Tape and Reel", RoHS=TRUE
SW0: library part CMP-1696-00002-1, "Slide Switch, 500 V, -20 to 70 degC, 3-Pin THD, RoHS", Case\Package=SOT-23-5, Dropout Voltage="300 mV", Max Input Voltage="8 V", Max Operating Temperature="85 degC", Max Ouput Current="150 mA", Max Power Dissipation="250 mW", Min Input Voltage="4.3 V", Min Operating Temperature="-40 degC", Nominal Output Voltage="3.3 V", Package Quantity=3000, ComponentLink1Description="Manufacturer URL", ComponentLink1URL=http://www.e-switch.ch/en/, ComponentLink2Description=Datasheet, ComponentLink2URL=https://www.e-switch.com/system/asset/product_line/data_sheet/119/EG.pdf, DatasheetVersion=Oct-15, Height="1.3 mm", Length="3 mm", Mount="Surface Mount", Output Current="150 mA", Output Voltage="3.3 V", Outputs=1, PackageDescription="3-Pin Through Hole Device, Body 11.6 x 4 mm, Pitch 2.5 mm", PackageReference=EG1218, Packaging="Tape and Reel", Pins=5, Power Rating="250 mW", Radiation Hardening=No, REACH SVHC="No SVHC", RoHSCompliant=true, Width="1.8 mm"
U1: library part CMP-031-00006-1, "ARMÂ® CortexÂ®-M4 STM32F4 Microcontroller IC 32-Bit Single-Core 168MHz 1MB (1M x 8) FLASH 64-LQFP (10x10)", Case/Package="LQFP-64 STMicroelectronics", Check_prices=https://www.snapeda.com/parts/STM32F405RGT6/STMicroelectronics/view-part/?ref=eda, Component Type=Standard, Design Item ID=STM32F405RGT6, MF=STMicroelectronics, MP=STM32F405RGT6, Pins=64, SnapEDA_Link=https://www.snapeda.com/parts/STM32F405RGT6/STMicroelectronics/view-part/?ref=snap, Source=STM32F405RGT6.SchLib
U2 U6: library part CMP-0062-01631-4, "800mA Low-Dropout Linear Regulator, 4-pin SOT-223, Pb-Free", Manufacturer="Texas Instruments", PackageTopMarking=XYTT*N05B, PowerWise=N, Code_IPC=SOT223-4, Code_JEDEC=TO-261-AA, ComponentLink1Description="Datasheet URL", ComponentLink1URL=http://www.ti.com/general/docs/lit/getliterature.tsp?genericPartNumber=LM1117-N&fileType=pdf, CompType="LDO IC", High-Reliability=Y, PackageDescription="Molded SOT-223, 6.50 x 3.56 x 1.6mm Body, 4 Lead, 2.3mm Pitch", PackageReference=DCY0004A, PartNumber=LM1117IMP-3.3/NOPB, PinCount=4, RoHS=Y
U3: "Buck Switching Regulator IC Positive Adjustable 0.925V 1 Output 3A 8-SOIC (0.154, 3.90mm Width) Exposed Pad", Package="SOIC-8 Monolithic Power", Availability="In Stock", Check_prices=https://www.snapeda.com/parts/MP2307DN-LF-Z/Monolithic+Power+Systems+Inc./view-part/?ref=eda, MF="Monolithic Power", MP=MP2307DN-LF-Z, Price=None, Purchase-URL=https://pricing.snapeda.com/search/part/MP2307DN-LF-Z/?ref=eda, SnapEDA_Link=https://www.snapeda.com/parts/MP2307DN-LF-Z/Monolithic+Power+Systems+Inc./view-part/?ref=snap
U5: library part CMP-1529-00004-3, "IC MOTOR DRIVER PAR 16HTSSOP", Case/Package=HTSSOP, Max Operating Temperature=85°C, Max Output Current=2A, Max Supply Voltage=10.8V, Min Operating Temperature=-40°C, Min Supply Voltage=2.7V, Nominal Supply Current=3mA, Output Current=1.5A, Package Quantity=2000, Fault Protection="Over Temperature", Interface=PWM, Lead Free="Lead Free", Number of Outputs=2, Number of Pins=16, Output Current per Channel=1.5A, Packaging="Tape and Reel", Radiation Hardening=No, REACH SVHC="No SVHC", RMS Current (Irms)=1.5A, RoHS Compliant=Yes, Series=DRV8833, Supply Current=3mA, Technology=NMOS
U_enA U_enB: JLCPCB Part Class="Extended Part", LCSC Part Name=霍尔在线编程角度位置传感器, Manufacturer=MagnTek(麦歌恩), Add into BOM=yes, Convert to PCB=yes, Datasheet=https://item.szlcsc.com/datasheet/MT6701CT-STD/3056853.html, Device=MT6701CT-STD, Manufacturer Part=MT6701CT-STD, Supplier=LCSC, Supplier Footprint=SOP-8, Supplier Part=C2856764, Symbol=MT6701CT-STD
Y1: library part CMP-27762-009874-1, "CRYSTAL 8.0000MHZ 18PF SMD", Case/Package=SMD/SMT, ESR (Equivalent Series Resistance)=80R, Frequency=8MHz, Frequency Stability=50ppm, Frequency Tolerance=20ppm, Load Capacitance=18pF, Max Operating Temperature=70°C, Min Operating Temperature=-20°C, Operating Frequency="8 MHz", Package Quantity=1000, Accuracy=20ppm, Contact Plating=Tin, Depth=4.7mm, Height=0.165inch, Lead Free="Lead Free", Length=11.4mm, Mount="Surface Mount", Number of Pins=2, Packaging="Tape and Reel", Radiation Hardening=No, REACH SVHC="No SVHC", Series=ABLS, Series Resistance=80R, Termination=SMD/SMT, Tolerance=20ppm, Width=4.7mm

## Via types
v1: diameter 0.5, hole 0.3, Top Layer to Bottom Layer, 87 vias
v2: diameter 1.27/1.27 (per signal layer), hole 0.711, Top Layer to Bottom Layer, 48 vias
v3: diameter 2, hole 2, Top Layer to Bottom Layer, 11 vias
v4: diameter 1.27, hole 0.711, Top Layer to Bottom Layer, 8 vias
v5: diameter 0.5, hole 0.2, Top Layer to Bottom Layer, 1 vias
v6: diameter 2/2 (per signal layer), hole 2, Top Layer to Bottom Layer, 1 vias
v7: diameter 1, hole 0.3, Top Layer to Bottom Layer, 1 vias

## Nets (pads, with @x,y where several pads share a name; then routed paths per layer and width w, separated by ;. In a path a pad name is that pad's centre, name@x,y a point inside that pad or via, vN(x,y) a via of type N, cw(c..) or ccw(c..) an arc to the next point about the centre after c; other vN are vias at no path point)
BOOT0: R_BT0_1.1 U1.60 | length 76.4
  Top Layer w0.254: v2(15.575,69.6) 15.575,71.3 17.525,73.25 17.525,77.95 22.7,83.125 24.332,83.125 U1.60@26.21,81.247 ; v2(16.525,62.325) 54.625,62.325 60.118,67.818 60.118,69.818 R_BT0_1.1@60.175,69.875
  Bottom Layer w0.254: v2(15.575,69.6) 15.575,63.275 v2(16.525,62.325)
BUZZER: Q3.1 R_BUZZ.2 U1.57 | length 66.2
  Top Layer w0.254: U1.57@27.271,82.308 28.328,81.25 28.328,80.403 v1(28.325,80.4) ; v2(29.05,58.5) 30.94,58.5 33.55,55.89 v2(33.55,48.775) ; Q3.1@32.275,32.6 32.275,30.001 32.875,29.401 v2(32.875,29.375) 36.525,33.025 v1(36.525,34.625) ; R_BUZZ.2@32.875,26.675 32.925,26.725 v2@32.925,29.275
  Bottom Layer w0.254: v1(28.325,80.4) 28.325,80.375 29.875,78.825 29.875,59.325 v2(29.05,58.5) ; v2(33.55,48.775) 36.525,45.8 v1(36.525,34.625)
DBL_1: DBL_1.2 U1.20 | length 72.2
  Top Layer w0.254: U1.20@33.875,72.875 33.875,72.857 34.617,72.115 v1(34.617,70.169) ; v1(40.1,34.625) 43.021,31.704 43.021,7.496 41.473,5.948 41.473,5.898 40.925,5.35 DBL_1.2@40.875,5.35
  Bottom Layer w0.254: v1(34.617,70.169) 34.617,52.833 39.675,47.775 39.675,35.093 40.1,34.668 v1(40.1,34.625)
DBL_2: DBL_2.2 U1.21 | length 71.7
  Top Layer w0.254: U1.21@34.229,73.229 35.183,72.274 35.183,71.719 35.7,71.202 v1(35.7,70.425) ; v1(41.175,34.575) 43.375,32.375 DBL_2.2@43.375,5.35
  Bottom Layer w0.254: v1(35.7,70.425) 35.7,53 40.45,48.25 40.45,35.3 v1(41.175,34.575)
DBL_3: DBL_3.2 U1.22 | length 74
  Top Layer w0.254: U1.22@34.582,73.582 36.068,72.096 v1(36.1,72.096) ; v1(42.225,34.575) 44.175,32.625 44.175,7.05 45.277,5.948 45.277,5.898 45.825,5.35 DBL_3.2@45.875,5.35
  Bottom Layer w0.254: v1(36.1,72.096) 36.147,72.049 36.147,71.875 36.177,71.846 36.177,56.704 43.5,49.381 43.5,35.85 v1(42.225,34.575)
DBL_4: DBL_4.2 U1.23 | length 74.9
  Top Layer w0.254: U1.23@34.936,73.936 36.781,72.09 36.781,71.49 v1(36.812,71.459) ; v1(43.4,34.575) 44.615,33.36 44.615,9.11 47.777,5.948 47.777,5.898 48.325,5.35 DBL_4.2@48.375,5.35
  Bottom Layer w0.254: v1(36.812,71.459) 36.812,57.313 36.875,57.25 44.27,49.855 44.344,49.781 44.344,49.674 44.177,35.336 44.102,35.261 44.101,35.26 v1(43.4,34.575)
DBL_5: DBL_5.2 U1.24 | length 76
  Top Layer w0.254: U1.24@35.289,74.289 37.325,72.253 v1(37.325,70.5) ; v1(44.5,34.6) 44.969,34.131 44.969,11.256 DBL_5.2@50.875,5.35
  Bottom Layer w0.254: v1(37.325,70.5) 37.325,58.45 45.225,50.55 45.225,35.325 v1(44.5,34.6)
DBL_6: DBL_6.2 U1.25 | length 77
  Top Layer w0.254: U1.25@35.643,74.643 v1(37.403,72.882) ; v1(45.75,34.625) 45.75,34.587 45.323,34.16 45.323,13.352 53.325,5.35 DBL_6.2@53.375,5.35